# Altium PCB F407ZGT6.PcbDoc (part 4 of 7)
Units mil, origin at the board's own origin, x right, y up, seen from the top; angles counter-clockwise.
Board outline 4380 x 3940 mil, 2 copper layers (Top Layer, Bottom Layer); 88 components, 146 nets, 552 pads, 268 vias.
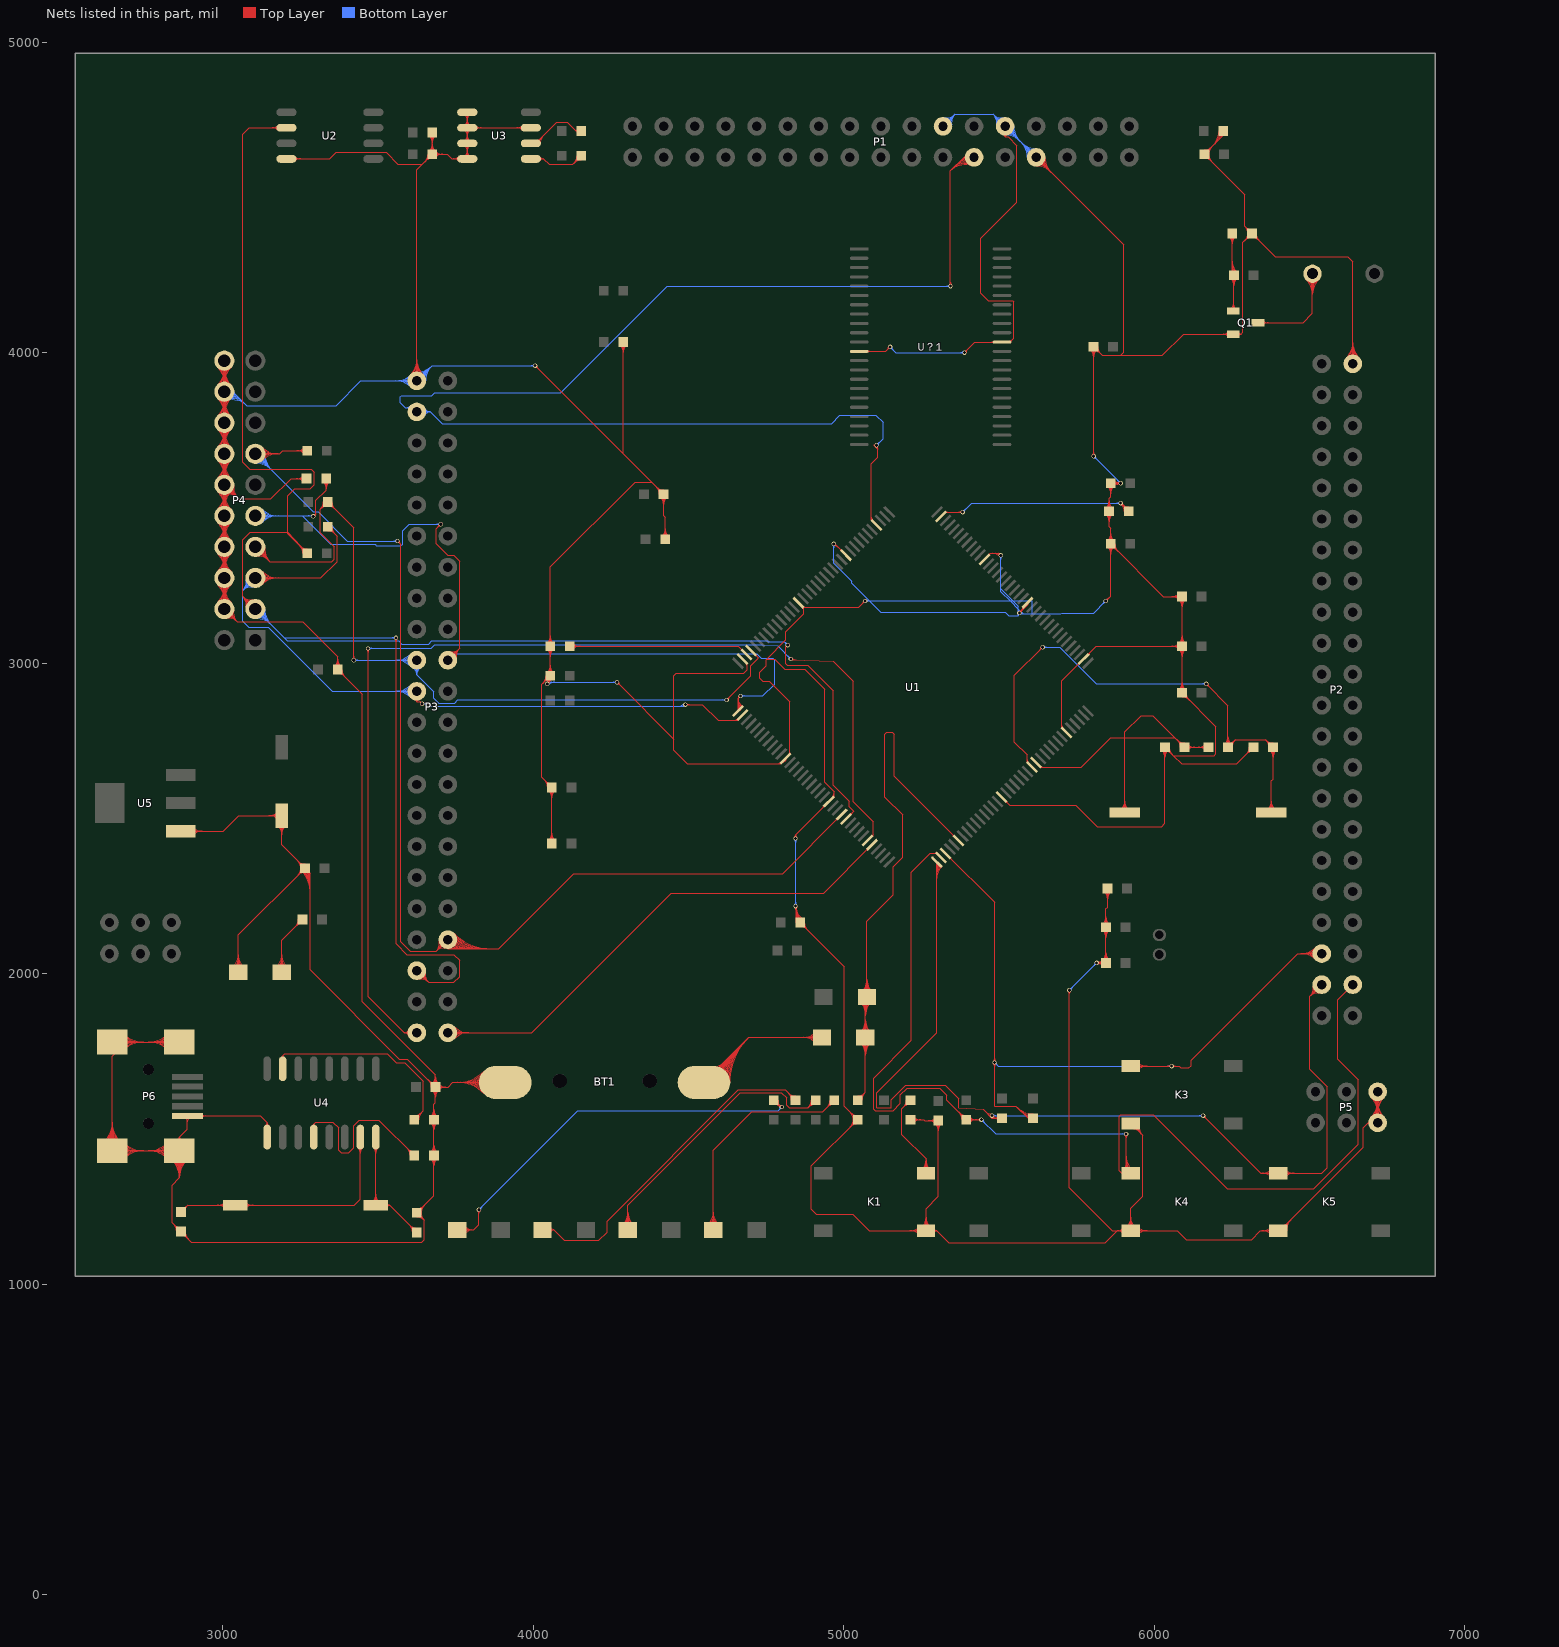
[diagram p4: the nets of this part, all layers, seen from the top]

## Via types
v1: diameter 14, hole 10, Top Layer to Bottom Layer, 265 vias
v2: diameter 150, hole 150, Top Layer to Bottom Layer, 3 vias

## Nets (pads, with @x,y where several pads share a name; then routed paths per layer and width w, separated by ;. In a path a pad name is that pad's centre, name@x,y a point inside that pad or via, vN(x,y) a via of type N, cw(c..) or ccw(c..) an arc to the next point about the centre after c; other vN are vias at no path point) (continued)
GND: (continued)
  Bottom Layer w4: P4.18@3004.56,3876.44 cw(c3014.66,3843.16) 3039.25,3867.75 ; P4.18@3005,3875 3032,3875 3077,3830 ; P4.18@3005.73,3872.61 cw(c3016.86,3835.92) 3043.97,3863.03 ; P4.18@3006.89,3868.78 cw(c3019.06,3828.68) 3048.69,3858.31 ; P4.18@3008.05,3864.95 cw(c3021.25,3821.44) 3053.41,3853.59 ; P4.18@3009.21,3861.12 cw(c3023.45,3814.2) 3058.12,3848.88 ; P4.18@3010.37,3857.3 cw(c3025.65,3806.96) 3062.84,3844.16 ; P4.18@3011.53,3853.47 cw(c3027.84,3799.72) 3067.56,3839.44 ; P4.18@3012.7,3849.64 cw(c3030.04,3792.48) 3072.28,3834.72 ; P4.18@3013.86,3845.81 cw(c3032.24,3785.24) 3077,3830 ; P4.18@3035.5,3875 ccw(c3043.95,3875) 3037.97,3869.03 ; P3.44@3605.2,3890.2 ccw(c3557.4,3842.4) 3557.4,3910 ccw(c3557.4,3977.6) P3.44@3605.2,3929.8 ; P3.44@3608.03,3893.03 ccw(c3567.06,3852.06) 3567.06,3910 ccw(c3567.06,3967.94) P3.44@3608.03,3926.97 ; P3.44@3610.86,3895.86 ccw(c3576.72,3861.72) 3576.72,3910 ccw(c3576.72,3958.28) P3.44@3610.86,3924.14 ; P3.44@3613.69,3898.69 ccw(c3586.37,3871.37) 3586.37,3910 ccw(c3586.37,3948.63) P3.44@3613.69,3921.31 ; P3.44@3625,3926 ccw(c3625,3964.63) 3652.31,3937.31 ccw(c3679.63,3910) P3.44@3641,3910 ; P3.44@3625,3930 ccw(c3625,3978.28) 3659.14,3944.14 ccw(c3693.28,3910) P3.44@3645,3910 ; P3.44@3625,3934 ccw(c3625,3991.94) 3665.97,3950.97 ccw(c3706.94,3910) P3.44@3649,3910 ; P3.44@3625,3938 ccw(c3625,4005.6) 3672.8,3957.8 ccw(c3720.6,3910) P3.44@3653,3910 ; v1@4002.46,3955.46 ccw(c3993.93,3946.93) 3993.93,3959 ccw(c3993.93,3971.07) v1@4002.46,3962.54 ; v1(4006,3959) 3674,3959 P3.44@3625,3910 3445,3910 3365,3830 3077,3830 ; v1(4045,2934) 4050,2939 v1(4270,2939) ; v1@4045.71,2933.29 cw(c4059.49,2919.51) 4059.49,2939 ; v1@4048.54,2930.46 cw(c4069.14,2909.86) 4069.14,2939 ; v1@4266.46,2935.46 ccw(c4257.93,2926.93) 4257.93,2939 ccw(c4257.93,2951.07) v1@4266.46,2942.54 ; v1@4841.46,2221.54 ccw(c4832.93,2230.07) 4845,2230.07 ccw(c4857.07,2230.07) v1@4848.54,2221.54 ; v1@4841.46,2432.46 cw(c4832.93,2423.93) 4845,2423.93 cw(c4857.07,2423.93) v1@4848.54,2432.46 ; v1(4845,2218) v1(4845,2436) ; v1@4964.46,3381.46 cw(c4955.93,3372.93) 4968,3372.93 cw(c4980.07,3372.93) v1@4971.54,3381.46 ; v1(4968,3385) 4968,3323.19 5026.19,3265 5026.19,3257.81 5083,3201 ; v1(5069,3201) 5083,3201 ; v1@5072.54,3197.46 cw(c5081.07,3188.93) 5081.07,3201 cw(c5081.07,3213.07) v1@5072.54,3204.54 ; v1@5149.5,4014.5 cw(c5149.5,4002.43) 5158.04,4010.96 cw(c5166.57,4019.5) v1@5154.5,4019.5 ; v1(5149.5,4019.5) 5168,4001 v1(5389,4001) ; P1.22@5320,4730 5358,4768 ; P1.22@5322.79,4745.75 ccw(c5326.53,4766.89) 5341.71,4751.71 ccw(c5356.89,4736.53) P1.22@5335.75,4732.79 ; P1.22@5323.49,4749.69 ccw(c5328.17,4776.12) 5347.14,4757.14 ccw(c5366.12,4738.17) P1.22@5339.69,4733.49 ; P1.22@5324.19,4753.63 ccw(c5329.8,4785.34) 5352.57,4762.57 ccw(c5375.34,4739.8) P1.22@5343.63,4734.19 ; P1.22@5324.88,4757.57 ccw(c5331.43,4794.56) 5358,4768 ; P1.22@5347.57,4734.88 cw(c5384.56,4741.43) 5358,4768 ; v1@5385.46,3997.46 ccw(c5376.93,3988.93) 5376.93,4001 ccw(c5376.93,4013.07) v1@5385.46,4004.54 ; P1.26@5492.43,4734.88 ccw(c5455.44,4741.43) 5482,4768 ; P1.26@5496.37,4734.19 ccw(c5464.66,4739.8) 5487.43,4762.57 ccw(c5510.2,4785.34) P1.26@5515.81,4753.63 ; P1.26@5500.31,4733.49 ccw(c5473.88,4738.17) 5492.86,4757.14 ccw(c5511.83,4776.12) P1.26@5516.51,4749.69 ; v1@5502.46,3344.46 cw(c5493.93,3335.93) 5506,3335.93 cw(c5518.07,3335.93) v1@5509.54,3344.46 ; P1.26@5504.25,4732.79 ccw(c5483.11,4736.53) 5498.29,4751.71 ccw(c5513.47,4766.89) P1.26@5517.21,4745.75 ; v1(5506,3348) 5506,3240 ; P1.26@5515.12,4757.57 cw(c5508.57,4794.56) 5482,4768 ; P1.26@5520,4702 cw(c5520,4634.4) 5567.8,4682.2 cw(c5615.6,4730) P1.26@5548,4730 ; P1.26@5520,4706 cw(c5520,4648.06) 5560.97,4689.03 cw(c5601.94,4730) P1.26@5544,4730 ; P1.26@5520,4710 cw(c5520,4661.72) 5554.14,4695.86 cw(c5588.28,4730) P1.26@5540,4730 ; P1.26@5520,4714 cw(c5520,4675.37) 5547.31,4702.69 cw(c5574.63,4730) P1.26@5536,4730 ; 5562,3169.22 ccw(c5568.72,3169.22) v1@5566.35,3162.94 ; v1@5562.14,3158.82 cw(c5558.78,3156.06) 5561.85,3152.98 ; v1@5562.27,3165.33 ccw(c5557.02,3170.02) 5562,3175 ; 5564.99,3172.01 cw(c5560.18,3167.2) v1@5565.25,3162.67 ; v1(5566,3162) 5562,3166 5562,3175 ; v1@5567.76,3166.68 cw(c5570.89,3175) 5562,3175 ; 5567.98,3169.02 cw(c5563.34,3164.37) v1@5568.24,3160 ; v1@5570.62,3163.92 ccw(c5578,3167) 5578,3159 ; P1.27@5592,4630 ccw(c5524.4,4630) 5572.2,4677.8 ccw(c5620,4725.6) P1.27@5620,4658 ; P1.27@5596,4630 ccw(c5538.06,4630) 5579.03,4670.97 ccw(c5620,4711.94) P1.27@5620,4654 ; P1.27@5600,4630 ccw(c5551.72,4630) 5585.86,4664.14 ccw(c5620,4698.28) P1.27@5620,4650 ; P1.27@5604,4630 ccw(c5565.37,4630) 5592.69,4657.31 ccw(c5620,4684.63) P1.27@5620,4646 ; P1.27@5620,4630 P1.26@5520,4730 5482,4768 ; v1(5727,1947) v1(5815,2035) ; v1@5727,1952 ccw(c5727,1964.07) 5735.54,1955.54 ccw(c5744.07,1947) v1@5732,1947 ; v1@5805,3662 cw(c5805,3649.93) 5813.54,3658.46 cw(c5822.07,3667) v1@5810,3667 ; v1(5805,3667) v1(5892,3580) ; v1@5810,2035 cw(c5797.93,2035) 5806.46,2026.46 cw(c5815,2017.93) v1@5815,2030 ; v1@5839.12,3201 cw(c5827.05,3201) 5835.59,3192.46 cw(c5844.12,3183.93) v1@5844.12,3196 ; v1(5844.12,3201) 5805.12,3162 5703,3162 5700,3159 5608,3159 ; v1@5887,3580 ccw(c5874.93,3580) 5883.46,3588.54 ccw(c5892,3597.07) v1@5892,3585 ; 5083,3201 5536,3201 ; 5083,3201 5119,3165 5519.84,3165 5531.85,3152.98 5561.85,3152.98 ; 5358,4768 5482,4768 ; 5506,3240 5506,3231 5536,3201 ; 5506,3240 5545,3201 ; 5536,3201 5562,3175 ; 5536,3201 5545,3201 ; 5545,3201 5608,3201 5608,3159 ; 5545,3201 5562,3184 5562,3175 ; 5561.85,3152.98 5567.87,3159 5578,3159 ; 5562,3175 5578,3159 ; 5578,3159 5608,3159
IIC-SCL: R14.1 U3.6 | length 288.6
  Top Layer w4: U3.6@3992.36,4675 4008,4675 4076,4743 4109,4743 4137,4715 ; U3.6@4012.36,4685.5 ccw(c4012.36,4700.32) 4022.84,4689.84 ; U3.6@4014.86,4675 cw(c4031.43,4675) 4019.71,4686.71 ; U3.6@4018.86,4675 cw(c4045.09,4675) 4026.54,4693.54 ; U3.6@4022.86,4675 cw(c4058.74,4675) 4033.37,4700.37 ; R14.1@4141.74,4711.38 ccw(c4137,4710.09) 4137,4715 ; R14.1@4141.74,4718.62 cw(c4137,4719.91) 4137,4715 ; R14.1@4155,4715 4137,4715
IIC-SDA: R15.1 U3.5 | length 316.6
  Top Layer w4: U3.5@3992.36,4625 4033,4625 ; U3.5@4017.62,4621.17 cw(c4025.14,4615.7) 4025.14,4625 cw(c4025.14,4634.3) U3.5@4017.62,4628.83 ; U3.5@4020.85,4618.82 cw(c4033,4609.97) 4033,4625 ; U3.5@4020.85,4631.18 ccw(c4033,4640.03) 4033,4625 ; R15.1@4141.25,4635 cw(c4108.06,4635) 4131.53,4611.53 cw(c4155,4588.06) R15.1@4155,4621.25 ; R15.1@4145.25,4635 cw(c4121.72,4635) 4138.36,4618.36 cw(c4155,4601.72) R15.1@4155,4625.25 ; R15.1@4155,4635 4127,4607 4051,4607 4033,4625
IIC_SCL: P3.2 U1.139 | length 3651.9
  Top Layer w4: v1@3464.46,3044.46 cw(c3455.93,3035.93) 3468,3035.93 cw(c3480.07,3035.93) v1@3471.54,3044.46 ; v1(3468,3048) 3468,1926 3584,1810 ; P3.2@3598.92,1799.81 ccw(c3584,1793.98) 3584,1810 ; P3.2@3598.92,1820.19 cw(c3584,1826.02) 3584,1810 ; P3.2@3602.65,1801.27 ccw(c3589.86,1796.27) 3589.86,1810 ccw(c3589.86,1823.73) P3.2@3602.65,1818.73 ; P3.2@3625,1810 3584,1810 ; v1(4829.77,3014) 4829.77,3012 4966.77,3006.23 5031,2942 5031,2554 5096,2489 5096,2448.31 U1.139@5077.29,2429.6 ; v1@4830.51,3014.68 ccw(c4837.31,3020.93) 4836.92,3011.7 ; v1@4833.15,3010.32 cw(c4836.71,3006.45) 4836.93,3011.7 ; v1@4833.45,3017.38 ccw(c4847.36,3030.17) 4846.57,3011.29 ; U1.139@5090.93,2445.57 ccw(c5090.93,2451.2) 5094.91,2447.22 ccw(c5098.89,2443.24) U1.139@5093.26,2443.24
  Bottom Layer w4: v1(3468,3048) 3671,3048 3683,3060 4738.15,3060 4786.86,3056.91 v1(4829.77,3014) ; v1@3471.54,3044.46 cw(c3480.07,3035.93) 3480.07,3048 cw(c3480.07,3060.07) v1@3471.54,3051.54 ; v1@4824.77,3014 ccw(c4812.7,3014) 4821.23,3022.54 ccw(c4829.77,3031.07) v1@4829.77,3019
IIC_SDA: P3.1 U1.140 | length 1959.6
  Top Layer w4: P3.1@3725,1810 3995,1810 4445,2260 4935.53,2260 U1.140@5091.21,2415.68 ; P3.1@3736.31,1798.69 cw(c3763.63,1771.37) 3763.63,1810 cw(c3763.63,1848.63) P3.1@3736.31,1821.31 ; P3.1@3739.14,1795.86 cw(c3773.28,1761.72) 3773.28,1810 cw(c3773.28,1858.28) P3.1@3739.14,1824.14 ; P3.1@3741.97,1793.03 cw(c3782.94,1752.06) 3782.94,1810 cw(c3782.94,1867.94) P3.1@3741.97,1826.97 ; P3.1@3744.8,1790.2 cw(c3792.6,1742.4) 3792.6,1810 cw(c3792.6,1877.6) P3.1@3744.8,1829.8 ; U1.140@5075.24,2402.04 cw(c5069.61,2402.04) 5073.59,2398.06 cw(c5077.57,2394.08) U1.140@5077.57,2399.71
JTCK: P3.25 P4.9 R7.2 U1.109 | length 3657.9
  Top Layer w4: v1(3291.5,3473.5) 3300,3482 ; v1@3291.52,3478.5 ccw(c3291.55,3490.45) 3300,3482 ; v1@3296.5,3473.52 cw(c3308.45,3473.55) 3300,3482 ; R7.2@3323.27,3585.28 cw(c3299.8,3561.81) 3332.99,3561.81 cw(c3366.18,3561.81) R7.2@3342.71,3585.28 ; R7.2@3326.1,3588.11 cw(c3309.46,3571.47) 3332.99,3571.47 cw(c3356.53,3571.47) R7.2@3339.88,3588.11 ; R7.2@3332.99,3595 3332.99,3557.99 3300,3525 3300,3482 ; v1@3697,3448 cw(c3684.93,3448) 3693.46,3439.46 cw(c3702,3430.93) v1@3702,3443 ; v1(3702,3448) 3687,3433 3687,3386 3725,3348 3744,3348 3763,3329 3763,3048 ; P3.25@3725,3010 3763,3048 ; P3.25@3727.79,3025.75 ccw(c3731.53,3046.89) 3746.71,3031.71 ccw(c3761.89,3016.53) P3.25@3740.75,3012.79 ; P3.25@3728.49,3029.69 ccw(c3733.17,3056.12) 3752.14,3037.14 ccw(c3771.12,3018.17) P3.25@3744.69,3013.49 ; P3.25@3729.19,3033.63 ccw(c3734.8,3065.34) 3757.57,3042.57 ccw(c3780.34,3019.8) P3.25@3748.63,3014.19 ; P3.25@3729.88,3037.57 ccw(c3736.43,3074.56) 3763,3048 ; P3.25@3752.57,3014.88 cw(c3789.56,3021.43) 3763,3048 ; U1.109@4659.71,2847.18 4659.71,2887 ; 4659.71,2860.77 ccw(c4673.33,2860.77) U1.109@4667.09,2848.66 ; 4659.71,2867.33 ccw(c4676.7,2867.33) U1.109@4668.92,2852.22 ; 4659.71,2873.89 ccw(c4680.07,2873.89) U1.109@4670.76,2855.78 ; 4659.71,2880.44 ccw(c4683.45,2880.44) U1.109@4672.59,2859.33 ; v1@4662.71,2894.77 cw(c4652.43,2894.28) 4659.71,2887 ; v1@4667.47,2890.01 ccw(c4666.99,2879.72) 4659.71,2887 ; v1(4667.71,2895) 4659.71,2887 ; U1.109@4674.42,2862.89 cw(c4686.82,2887) 4659.71,2887
  Bottom Layer w4: P4.9@3105,3475 3256,3475 ; P4.9@3115.25,3464.75 cw(c3140.01,3439.99) 3140.01,3475 cw(c3140.01,3510.01) P4.9@3115.25,3485.25 ; P4.9@3118.08,3461.92 cw(c3149.66,3430.34) 3149.66,3475 cw(c3149.66,3519.66) P4.9@3118.08,3488.08 ; P4.9@3120.91,3459.09 cw(c3159.32,3420.68) 3159.32,3475 cw(c3159.32,3529.32) P4.9@3120.91,3490.91 ; P4.9@3123.74,3456.26 cw(c3168.98,3411.02) 3168.98,3475 cw(c3168.98,3538.98) P4.9@3123.74,3493.74 ; P4.9@3126.57,3453.43 cw(c3178.63,3401.37) 3178.63,3475 cw(c3178.63,3548.63) P4.9@3126.57,3496.57 ; 3275.81,3475 cw(c3275.81,3457.81) v1@3287.96,3469.96 ; 3283.05,3475 ccw(c3283.05,3481.95) v1@3287.96,3477.04 ; v1(3291.5,3473.5) 3290,3475 3256,3475 ; v1@3698.46,3444.46 ccw(c3689.93,3435.93) 3689.93,3448 ccw(c3689.93,3460.07) v1@3698.46,3451.54 ; v1(3702,3448) 3600,3448 3579,3427 3579,3384 3573.86,3378.86 3495,3378.86 3490.86,3383 3348,3383 3256,3475 ; P3.25@3725,3010 3746,3031 4720,3031 4734.09,3016.91 4772,3016.91 4777.23,3011.68 4777.23,2933.23 4739,2895 v1(4667.71,2895) ; v1@4671.24,2891.46 cw(c4679.78,2882.93) 4679.78,2895 cw(c4679.78,2907.07) v1@4671.24,2898.54
JTDI: P3.24 P4.5 R4.2 U1.110 | length 3570.5
  Top Layer w4: P4.5@3105,3275 3316,3275 3369,3328 3369,3408.99 R4.2@3337.99,3440 ; P4.5@3115.25,3264.75 cw(c3140.01,3239.99) 3140.01,3275 cw(c3140.01,3310.01) P4.5@3115.25,3285.25 ; P4.5@3118.08,3261.92 cw(c3149.66,3230.34) 3149.66,3275 cw(c3149.66,3319.66) P4.5@3118.08,3288.08 ; P4.5@3120.91,3259.09 cw(c3159.32,3220.68) 3159.32,3275 cw(c3159.32,3329.32) P4.5@3120.91,3290.91 ; P4.5@3123.74,3256.26 cw(c3168.98,3211.02) 3168.98,3275 cw(c3168.98,3338.98) P4.5@3123.74,3293.74 ; P4.5@3126.57,3253.43 cw(c3178.63,3201.37) 3178.63,3275 cw(c3178.63,3348.63) P4.5@3126.57,3296.57 ; R4.2@3337.99,3426.25 cw(c3337.99,3393.06) 3361.46,3416.53 cw(c3384.93,3440) R4.2@3351.74,3440 ; R4.2@3337.99,3430.25 cw(c3337.99,3406.72) 3354.63,3423.36 cw(c3371.27,3440) R4.2@3347.74,3440 ; P3.24@3620.44,2882.37 cw(c3619.55,2877) 3625,2877 ; P3.24@3625,2910 3625,2877 ; P3.24@3629.56,2882.37 ccw(c3630.45,2877) 3625,2877 ; v1@3637.06,2870.75 ccw(c3629.84,2871.84) 3635,2877 ; v1@3641.25,2874.94 cw(c3640.16,2882.16) 3635,2877 ; v1(3642,2870) 3635,2877 ; v1(4490,2867) 4545,2867 4596,2816 4656.37,2816 ; v1@4493.54,2863.46 cw(c4502.07,2854.93) 4502.07,2867 cw(c4502.07,2879.07) v1@4493.54,2870.54 ; 4645.62,2816 ccw(c4645.62,2833.98) U1.110@4658.34,2821.27 ; 4655.28,2816 ccw(c4655.28,2824.33) U1.110@4661.17,2818.44 ; U1.110@4657.66,2819.46 cw(c4653.22,2819.15) 4656.37,2816 ; U1.110@4659.82,2817.29 ccw(c4659.52,2812.85) 4656.37,2816 ; U1.110@4673.63,2833.26 4656.37,2816 ; 3625,2877 3635,2877
  Bottom Layer w4: P4.5@3075.01,3269.45 cw(c3035.82,3262.19) 3064,3234 ; P4.5@3078.94,3270.17 cw(c3044.89,3263.87) 3069.38,3239.38 cw(c3093.87,3214.89) P4.5@3100.17,3248.94 ; P4.5@3082.88,3270.9 cw(c3053.96,3265.55) 3074.76,3244.76 cw(c3095.55,3223.96) P4.5@3100.9,3252.88 ; P4.5@3086.81,3271.63 cw(c3063.04,3267.23) 3080.13,3250.13 cw(c3097.23,3233.04) P4.5@3101.63,3256.81 ; P4.5@3099.45,3245.01 ccw(c3092.19,3205.82) 3064,3234 ; P4.5@3105,3275 3064,3234 ; P3.24@3605.2,2890.2 ccw(c3557.4,2842.4) 3557.4,2910 ccw(c3557.4,2977.6) P3.24@3605.2,2929.8 ; P3.24@3608.03,2893.03 ccw(c3567.06,2852.06) 3567.06,2910 ccw(c3567.06,2967.94) P3.24@3608.03,2926.97 ; P3.24@3610.86,2895.86 ccw(c3576.72,2861.72) 3576.72,2910 ccw(c3576.72,2958.28) P3.24@3610.86,2924.14 ; P3.24@3613.69,2898.69 ccw(c3586.37,2871.37) 3586.37,2910 ccw(c3586.37,2948.63) P3.24@3613.69,2921.31 ; P3.24@3625,2910 3352,2910 3146,3116 3084,3116 3064,3136 3064,3234 ; v1(3642,2870) 3664,2870 3672,2862 4485,2862 v1(4490,2867) ; v1@3645.54,2866.46 cw(c3654.07,2857.93) 3654.07,2870 cw(c3654.07,2882.07) v1@3645.54,2873.54 ; 4465.86,2862 ccw(c4465.86,2891.14) v1@4486.46,2870.54 ; 4475.51,2862 ccw(c4475.51,2881.49) v1@4489.29,2867.71
JTDO: P3.7 P4.13 R6.2 U1.133 | length 6055.8
  Top Layer w4: P4.13@3105,3675 3183,3675 3193,3685 R6.2@3272.01,3685 ; P4.13@3115.25,3664.75 cw(c3140.01,3639.99) 3140.01,3675 cw(c3140.01,3710.01) P4.13@3115.25,3685.25 ; P4.13@3118.08,3661.92 cw(c3149.66,3630.34) 3149.66,3675 cw(c3149.66,3719.66) P4.13@3118.08,3688.08 ; P4.13@3120.91,3659.09 cw(c3159.32,3620.68) 3159.32,3675 cw(c3159.32,3729.32) P4.13@3120.91,3690.91 ; P4.13@3123.74,3656.26 cw(c3168.98,3611.02) 3168.98,3675 cw(c3168.98,3738.98) P4.13@3123.74,3693.74 ; P4.13@3126.57,3653.43 cw(c3178.63,3601.37) 3178.63,3675 cw(c3178.63,3748.63) P4.13@3126.57,3696.57 ; R6.2@3262.29,3675.28 ccw(c3238.82,3651.81) 3238.82,3685 ccw(c3238.82,3718.19) R6.2@3262.29,3694.72 ; R6.2@3265.12,3678.11 ccw(c3248.47,3661.47) 3248.47,3685 ccw(c3248.47,3708.53) R6.2@3265.12,3691.89 ; v1@3563,3389 cw(c3563,3376.93) 3571.54,3385.46 cw(c3580.07,3394) v1@3568,3394 ; v1(3563,3394) 3573,3384 3573,2103 3604,2072 3687,2072 ; P3.7@3697.43,2105.12 cw(c3660.44,2098.57) 3687,2072 ; P3.7@3701.37,2105.81 cw(c3669.66,2100.2) 3692.43,2077.43 cw(c3715.2,2054.66) P3.7@3720.81,2086.37 ; P3.7@3705.31,2106.51 cw(c3678.88,2101.83) 3697.86,2082.86 cw(c3716.83,2063.88) P3.7@3721.51,2090.31 ; P3.7@3708.03,2093.03 ccw(c3737.07,2122.07) 3737.07,2081 ; P3.7@3709.25,2107.21 cw(c3688.11,2103.47) 3703.29,2088.29 cw(c3718.47,2073.11) P3.7@3722.21,2094.25 ; P3.7@3710.86,2095.86 ccw(c3746.73,2131.73) 3746.73,2081 ; P3.7@3713.69,2098.69 ccw(c3756.38,2141.38) 3756.38,2081 ; P3.7@3716.51,2101.51 ccw(c3766.04,2151.04) 3766.04,2081 ; P3.7@3719.34,2104.34 ccw(c3775.7,2160.7) 3775.7,2081 ; P3.7@3720.12,2082.43 ccw(c3713.57,2045.44) 3687,2072 ; P3.7@3722.17,2107.17 ccw(c3785.36,2170.36) 3785.36,2081 ; P3.7@3727.83,2112.83 ccw(c3804.67,2189.67) 3804.67,2081 ; P3.7@3730.66,2115.66 ccw(c3814.33,2199.33) 3814.33,2081 ; P3.7@3733.49,2118.49 ccw(c3823.98,2208.98) 3823.98,2081 ; P3.7@3736.31,2121.31 ccw(c3833.64,2218.64) 3833.64,2081 ; P3.7@3739.14,2124.14 ccw(c3843.3,2228.3) 3843.3,2081 ; P3.7@3741.97,2126.97 ccw(c3852.95,2237.95) 3852.95,2081 ; P3.7@3744.8,2129.8 ccw(c3862.61,2247.61) 3862.61,2081 ; 3795.01,2081 cw(c3795.01,2180.01) P3.7@3725,2110 ; U1.133@4977.8,2499.47 cw(c4972.18,2499.47) 4976.15,2495.49 cw(c4980.13,2491.52) U1.133@4980.13,2497.14 ; U1.133@4993.77,2513.11 4803.66,2323 4131,2323 3889,2081 3725,2081 P3.7@3725,2110 ; 3687,2072 P3.7@3725,2110
  Bottom Layer w4: P4.13@3105,3644.5 cw(c3105,3570.87) 3157.07,3622.93 cw(c3209.13,3675) P4.13@3135.5,3675 ; P4.13@3105,3648.5 cw(c3105,3584.52) 3150.24,3629.76 cw(c3195.48,3675) P4.13@3131.5,3675 ; P4.13@3105,3652.5 cw(c3105,3598.18) 3143.41,3636.59 cw(c3181.82,3675) P4.13@3127.5,3675 ; P4.13@3105,3656.5 cw(c3105,3611.84) 3136.58,3643.42 cw(c3168.16,3675) P4.13@3123.5,3675 ; P4.13@3105,3660.5 cw(c3105,3625.49) 3129.75,3650.25 cw(c3154.51,3675) P4.13@3119.5,3675 ; P4.13@3105,3675 3291.27,3488.73 3306.86,3488.73 3401.59,3394 v1(3563,3394) ; v1@3559.46,3390.46 ccw(c3550.93,3381.93) 3550.93,3394 ccw(c3550.93,3406.07) v1@3559.46,3397.54
JTMS: P3.26 P4.7 R5.2 U1.105 | length 3596
  Top Layer w4: P4.7@3105,3375 3152,3328 ; P4.7@3106.39,3356.55 cw(c3108.99,3321.97) 3133.51,3346.49 cw(c3158.03,3371.01) P4.7@3123.45,3373.61 ; P4.7@3106.69,3352.56 cw(c3109.85,3310.51) 3139.67,3340.33 cw(c3169.49,3370.15) P4.7@3127.44,3373.31 ; P4.7@3106.99,3348.57 cw(c3110.71,3299.04) 3145.83,3334.17 cw(c3180.96,3369.29) P4.7@3131.43,3373.01 ; P4.7@3107.29,3344.59 cw(c3111.57,3287.58) 3152,3328 ; P4.7@3135.41,3372.71 ccw(c3192.42,3368.43) 3152,3328 ; R5.2@3324.24,3520 cw(c3291.05,3520) 3314.52,3496.53 cw(c3337.99,3473.06) 3337.99,3506.25 cw(c3337.99,3473.06) 3361.46,3496.53 cw(c3384.93,3520) R5.2@3351.74,3520 ; R5.2@3328.24,3520 cw(c3304.71,3520) 3321.35,3503.36 cw(c3337.99,3486.72) 3337.99,3510.25 cw(c3337.99,3486.72) 3354.63,3503.36 cw(c3371.27,3520) R5.2@3347.74,3520 ; v1@3418.46,3013.54 ccw(c3409.93,3022.07) 3422,3022.07 ccw(c3434.07,3022.07) v1@3425.54,3013.54 ; v1(3422,3010) 3422,3435.99 R5.2@3337.99,3520 3314,3496.01 3314,3420 3359,3375 3359,3336 3351,3328 3152,3328 ; v1(4623,2882) 4701,2960 4701,2993 4725,3017 4725,3018.52 U1.105@4701.47,3042.05 ; v1@4623,2887 ccw(c4623,2899.07) 4631.54,2890.54 ccw(c4640.07,2882) v1@4628,2882 ; U1.105@4715.11,3026.08 cw(c4715.11,3020.45) 4719.09,3024.43 cw(c4723.06,3028.41) U1.105@4717.44,3028.41
  Bottom Layer w4: v1(3422,3010) P3.26@3625,3010 3625,2963.74 ; v1@3425.54,3006.46 cw(c3434.07,2997.93) 3434.07,3010 cw(c3434.07,3022.07) v1@3425.54,3013.54 ; P3.26@3605.2,2990.2 ccw(c3557.4,2942.4) 3557.4,3010 ccw(c3557.4,3077.6) P3.26@3605.2,3029.8 ; P3.26@3608.03,2993.03 ccw(c3567.06,2952.06) 3567.06,3010 ccw(c3567.06,3067.94) P3.26@3608.03,3026.97 ; P3.26@3610.86,2995.86 ccw(c3576.72,2961.72) 3576.72,3010 ccw(c3576.72,3058.28) P3.26@3610.86,3024.14 ; P3.26@3612.02,2985.19 cw(c3600.79,2963.74) 3625,2963.74 ; P3.26@3613.69,2998.69 ccw(c3586.37,2971.37) 3586.37,3010 ccw(c3586.37,3048.63) P3.26@3613.69,3021.31 ; P3.26@3613.87,2988.74 cw(c3604.25,2970.35) 3625,2970.35 cw(c3645.75,2970.35) P3.26@3636.13,2988.74 ; P3.26@3615.73,2992.28 cw(c3607.71,2976.96) 3625,2976.96 cw(c3642.29,2976.96) P3.26@3634.27,2992.28 ; P3.26@3637.98,2985.19 ccw(c3649.21,2963.74) 3625,2963.74 ; v1@4619.46,2878.46 ccw(c4610.93,2869.93) 4610.93,2882 ccw(c4610.93,2894.07) v1@4619.46,2885.54 ; v1(4623,2882) 3757,2882 3747,2872 3696,2872 3680,2888 3680,2908.74 3625,2963.74
JTRST: P3.6 P4.3 R2.2 U1.134 U2.2 | length 7768.6
  Top Layer w4: P4.3@3075.01,3180.55 ccw(c3035.82,3187.81) 3064,3216 ; P4.3@3078.94,3179.83 ccw(c3044.89,3186.13) 3069.38,3210.62 ccw(c3093.87,3235.11) P4.3@3100.17,3201.06 ; P4.3@3082.88,3179.1 ccw(c3053.96,3184.45) 3074.76,3205.24 ccw(c3095.55,3226.04) P4.3@3100.9,3197.12 ; P4.3@3086.81,3178.37 ccw(c3063.04,3182.77) 3080.13,3199.87 ccw(c3097.23,3216.96) P4.3@3101.63,3193.19 ; P4.3@3099.45,3204.99 cw(c3092.19,3244.18) 3064,3216 ; P4.3@3105,3175 3064,3216 ; U2.2@3177.58,4717.58 ccw(c3159.65,4699.65) 3159.65,4725 ccw(c3159.65,4750.35) U2.2@3177.58,4732.42 ; U2.2@3180.4,4720.4 ccw(c3169.31,4709.31) 3169.31,4725 ccw(c3169.31,4740.69) U2.2@3180.4,4729.6 ; U2.2@3205,4725 3085,4725 3064,4704 3064,3648 3087,3625 3285,3625 3294,3616 3294,3576 3281,3563 3232,3563 3209,3540 3209,3422 ; R2.2@3258.26,3355 ccw(c3225.07,3355) 3248.54,3378.47 ccw(c3272.01,3401.94) R2.2@3272.01,3368.75 ; R2.2@3258.27,3355.42 ccw(c3225.09,3356.44) 3249.27,3379.18 ccw(c3273.45,3401.92) R2.2@3272.43,3368.74 ; R2.2@3262.26,3355 ccw(c3238.73,3355) 3255.37,3371.64 ccw(c3272.01,3388.28) R2.2@3272.01,3364.75 ; R2.2@3262.26,3355.3 ccw(c3238.74,3356.02) 3255.89,3372.14 ccw(c3273.03,3388.27) R2.2@3272.31,3364.74 ; v1@3554.46,3078.46 cw(c3545.93,3069.93) 3558,3069.93 cw(c3570.07,3069.93) v1@3561.54,3078.46 ; v1(3558,3082) 3558,2097 3593,2062 3744,2062 3763,2043 3763,1991 3744,1972 3663,1972 ; P3.6@3625,2010 3663,1972 ; P3.6@3627.79,1994.25 cw(c3631.53,1973.11) 3646.71,1988.29 cw(c3661.89,2003.47) P3.6@3640.75,2007.21 ; P3.6@3628.49,1990.31 cw(c3633.17,1963.88) 3652.14,1982.86 cw(c3671.12,2001.83) P3.6@3644.69,2006.51 ; P3.6@3629.19,1986.37 cw(c3634.8,1954.66) 3657.57,1977.43 cw(c3680.34,2000.2) P3.6@3648.63,2005.81 ; P3.6@3629.88,1982.43 cw(c3636.43,1945.44) 3663,1972 ; P3.6@3652.57,2005.12 ccw(c3689.56,1998.57) 3663,1972 ; v1@4814.81,3057.83 cw(c4808.36,3056.64) 4813,3052 ; v1@4818.83,3053.81 ccw(c4817.64,3047.36) 4813,3052 ; v1(4819.73,3058.73) 4813,3052 ; U1.134@5007.69,2499.19 5018,2509.5 5019.5,2509.5 5033,2523 5018,2538 5018,2555 4966,2607 4966,2912 4883.84,2994.16 4817.84,2994.16 4813,2999 4813,3052 ; U1.134@5021.33,2515.17 ccw(c5021.33,2524.42) 5027.88,2517.88 ; 3064,3216 3064,3398 3088,3422 3209,3422 ; 3209,3422 R2.2@3272.01,3355 3209,3418.01 3209,3422
  Bottom Layer w4: P4.3@3105,3144.5 cw(c3105,3070.87) 3157.07,3122.93 cw(c3209.13,3175) P4.3@3135.5,3175 ; P4.3@3105,3148.5 cw(c3105,3084.52) 3150.24,3129.76 cw(c3195.48,3175) P4.3@3131.5,3175 ; P4.3@3105,3152.5 cw(c3105,3098.18) 3143.41,3136.59 cw(c3181.82,3175) P4.3@3127.5,3175 ; P4.3@3105,3156.5 cw(c3105,3111.84) 3136.58,3143.42 cw(c3168.16,3175) P4.3@3123.5,3175 ; P4.3@3105,3160.5 cw(c3105,3125.49) 3129.75,3150.25 cw(c3154.51,3175) P4.3@3119.5,3175 ; P4.3@3105,3175 3198,3082 ; v1@3554.46,3078.46 ccw(c3545.93,3069.93) 3545.93,3082 ccw(c3545.93,3094.07) v1@3554.46,3085.54 ; v1(3558,3082) 3198,3082 ; v1@4814.73,3058.73 ccw(c4802.66,3058.73) 4811.2,3067.27 ccw(c4819.73,3075.8) v1@4819.73,3063.73 ; v1(4819.73,3058.73) 4808.71,3069.75 4756.45,3069.75 4754.2,3072 3673,3072 3663,3062 3577,3062 3567,3072 3208,3072 3198,3082
KEY_0: K3.4 P2.6 R20.1 U1.3 | length 3219
  Top Layer w4: U1.3@5327.84,2387.84 5486,2229.68 v1(5486,1714) 5486,1574 5555,1574 5594,1535 ; U1.3@5341.48,2371.87 cw(c5341.48,2366.24) 5345.46,2370.22 cw(c5349.44,2374.2) U1.3@5343.81,2374.2 ; v1@5482.46,1710.46 cw(c5473.93,1701.93) 5486,1701.93 cw(c5498.07,1701.93) v1@5489.54,1710.46 ; v1@5482.46,1717.54 ccw(c5473.93,1726.07) 5486,1726.07 ccw(c5498.07,1726.07) v1@5489.54,1717.54 ; 5559.22,1569.78 ccw(c5610,1620.57) R20.1@5610,1548.75 ; 5566.05,1562.95 ccw(c5610,1606.91) R20.1@5610,1544.75 ; 5572.87,1556.13 ccw(c5610,1593.25) R20.1@5610,1540.75 ; 5579.7,1549.3 ccw(c5610,1579.6) R20.1@5610,1536.75 ; 5586.53,1542.47 ccw(c5610,1565.94) R20.1@5610,1532.75 ; 5593.36,1535.64 ccw(c5610,1552.28) R20.1@5610,1528.75 ; R20.1@5596.41,1532.93 ccw(c5594,1532.56) 5594,1535 ; R20.1@5596.41,1537.07 cw(c5594,1537.44) 5594,1535 ; R20.1@5610,1535 5594,1535 ; K3.4@5924.65,1702.52 v1(6056.56,1702.52) 6080.63,1702.52 6086.53,1696.62 6112.06,1696.62 6119.44,1704 6119.44,1721.44 6463,2065 P2.6@6540,2065 ; K3.4@5941.34,1695.67 cw(c5957.87,1679.14) 5957.87,1702.52 cw(c5957.87,1725.9) K3.4@5941.34,1709.37 ; K3.4@5944.17,1692.84 cw(c5967.53,1669.48) 5967.53,1702.52 cw(c5967.53,1735.56) K3.4@5944.17,1712.2 ; K3.4@5946.99,1690.01 cw(c5977.18,1659.82) 5977.18,1702.52 cw(c5977.18,1745.22) K3.4@5946.99,1715.03 ; v1@6053.02,1698.98 ccw(c6044.49,1690.45) 6044.49,1702.52 ccw(c6044.49,1714.59) v1@6053.02,1706.06 ; v1@6060.1,1698.98 cw(c6068.63,1690.45) 6068.63,1702.52 cw(c6068.63,1714.59) v1@6060.1,1706.06 ; P2.6@6520.2,2045.2 ccw(c6472.4,1997.4) 6472.4,2065 ccw(c6472.4,2132.6) P2.6@6520.2,2084.8 ; P2.6@6523.03,2048.03 ccw(c6482.06,2007.06) 6482.06,2065 ccw(c6482.06,2122.94) P2.6@6523.03,2081.97 ; P2.6@6525.86,2050.86 ccw(c6491.72,2016.72) 6491.72,2065 ccw(c6491.72,2113.28) P2.6@6525.86,2079.14 ; P2.6@6528.69,2053.69 ccw(c6501.37,2026.37) 6501.37,2065 ccw(c6501.37,2103.63) P2.6@6528.69,2076.31
  Bottom Layer w4: v1@5486,1709 cw(c5486,1696.93) 5494.54,1705.46 cw(c5503.07,1714) v1@5491,1714 ; v1(5486,1714) 5497.48,1702.52 v1(6056.56,1702.52) ; v1@6053.02,1698.98 ccw(c6044.49,1690.45) 6044.49,1702.52 ccw(c6044.49,1714.59) v1@6053.02,1706.06
KEY_1: K4.4 P2.3 R21.1 U1.2 | length 4149.1
  Top Layer w4: U1.2@5298.63,2385.91 ccw(c5294.65,2381.93) 5294.65,2387.56 ccw(c5294.65,2393.19) U1.2@5298.63,2389.21 ; U1.2@5313.92,2373.92 5300.28,2387.56 5278.56,2387.56 5218,2327 5218,1786 5096.25,1664.25 5096.25,1564 5101.01,1559.24 5158.99,1559.24 5182.99,1583.24 5182.99,1609.99 5204,1631 5309,1631 5332,1608 5332,1593 R21.1@5395,1530 v1(5443.72,1530) ; R21.1@5381.25,1530 ccw(c5348.06,1530) 5371.53,1553.47 ccw(c5395,1576.94) R21.1@5395,1543.75 ; R21.1@5385.25,1530 ccw(c5361.72,1530) 5378.36,1546.64 ccw(c5395,1563.28) R21.1@5395,1539.75 ; R21.1@5401.89,1523.11 cw(c5418.53,1506.47) 5418.53,1530 cw(c5418.53,1553.53) R21.1@5401.89,1536.89 ; R21.1@5404.72,1520.28 cw(c5428.19,1496.81) 5428.19,1530 cw(c5428.19,1563.19) R21.1@5404.72,1539.72 ; v1@5440.18,1526.46 ccw(c5431.65,1517.93) 5431.65,1530 ccw(c5431.65,1542.07) v1@5440.18,1533.54 ; K4.4@5897.23,1355.53 ccw(c5895,1355.28) 5895,1357.52 ; K4.4@5897.23,1359.51 cw(c5895,1359.76) 5895,1357.52 ; K4.4@5902.3,1370.03 ccw(c5883.7,1388.62) 5910,1388.62 ; K4.4@5905.13,1367.2 ccw(c5893.36,1378.96) 5910,1378.96 ; v1@5906.46,1480.46 cw(c5897.93,1471.93) 5910,1471.93 cw(c5922.07,1471.93) v1@5913.54,1480.46 ; 5910,1382.84 ccw(c5940.12,1382.84) K4.4@5918.82,1361.54 ; 5910,1392.5 ccw(c5949.78,1392.5) K4.4@5921.65,1364.37 ; 5910,1402.16 ccw(c5959.44,1402.16) K4.4@5924.48,1367.2 ; 5910,1411.81 ccw(c5969.1,1411.81) K4.4@5927.31,1370.03 ; v1(5910,1484) K4.4@5910,1357.52 ; K4.4@5924.65,1357.52 K4.4@5910,1357.52 ; P2.3@6640,1965 6592,1917 6592,1724 6658,1658 6658,1451 6515,1308 6235,1308 5997,1546 5892,1546 5887.12,1541.12 5887.12,1365.4 5895,1357.52 ; 5895,1357.52 K4.4@5910,1357.52
  Bottom Layer w4: v1@5443.72,1525 cw(c5443.72,1512.93) 5452.25,1521.46 cw(c5460.79,1530) v1@5448.72,1530 ; v1(5443.72,1530) 5489.72,1484 v1(5910,1484) ; v1@5906.46,1480.46 ccw(c5897.93,1471.93) 5897.93,1484 ccw(c5897.93,1496.07) v1@5906.46,1487.54
KEY_2: K5.4 P2.4 R22.1 U1.1 | length 4029.2
  Top Layer w4: 5300,2307.8 cw(c5352.2,2307.8) U1.1@5315.29,2344.71 ; 5300,2317.46 cw(c5342.54,2317.46) U1.1@5312.46,2347.54 ; 5300,2327.11 cw(c5332.89,2327.11) U1.1@5309.63,2350.37 ; 5300,2336.77 cw(c5323.23,2336.77) U1.1@5306.8,2353.2 ; 5300,2346.43 cw(c5313.57,2346.43) U1.1@5303.98,2356.02 ; U1.1@5300,2356.08 cw(c5303.92,2356.08) U1.1@5301.15,2358.85 ; U1.1@5300,2360 5300,1810.49 5106.25,1616.74 5106.25,1569.24 5153.75,1569.24 5153.75,1594.89 5199.86,1641 5328,1641 5371,1598 5371,1569 5449.72,1563 5477.72,1535 5486,1535 ; 5455.33,1557.39 ccw(c5478,1580.07) v1@5478,1548 ; 5462.15,1550.56 ccw(c5478,1566.41) v1@5478,1544 ; 5468.98,1543.73 ccw(c5478,1552.75) v1@5478,1540 ; v1(5478,1543) 5486,1535 ; v1@5478.23,1538.01 cw(c5478.72,1527.72) 5486,1535 ; v1@5482.99,1542.77 ccw(c5493.28,1542.28) 5486,1535 ; R22.1@5498.14,1528.05 ccw(c5486,1520.93) 5486,1535 ; R22.1@5498.14,1541.95 cw(c5486,1549.07) 5486,1535 ; R22.1@5501.59,1530.07 ccw(c5492.98,1525.02) 5492.98,1535 ccw(c5492.98,1544.98) R22.1@5501.59,1539.93 ; R22.1@5510,1535 5486,1535 ; v1@6158,1538 cw(c6158,1525.93) 6166.54,1534.46 cw(c6175.07,1543) v1@6163,1543 ; v1(6158,1543) 6343.48,1357.52 K5.4@6399.65,1357.52 6539.52,1357.52 6558,1376 6558,1636 6502,1692 6502,1927 ; K5.4@6377.3,1345.01 ccw(c6347.11,1314.82) 6347.11,1357.52 ccw(c6347.11,1400.22) K5.4@6377.3,1370.03 ; K5.4@6380.13,1347.84 ccw(c6356.77,1324.48) 6356.77,1357.52 ccw(c6356.77,1390.56) K5.4@6380.13,1367.2 ; K5.4@6382.96,1350.67 ccw(c6366.42,1334.14) 6366.42,1357.52 ccw(c6366.42,1380.9) K5.4@6382.96,1364.37 ; K5.4@6416.34,1350.67 cw(c6432.87,1334.14) 6432.87,1357.52 cw(c6432.87,1380.9) K5.4@6416.34,1364.37 ; K5.4@6419.17,1347.84 cw(c6442.53,1324.48) 6442.53,1357.52 cw(c6442.53,1390.56) K5.4@6419.17,1367.2 ; K5.4@6421.99,1345.01 cw(c6452.18,1314.82) 6452.18,1357.52 cw(c6452.18,1400.22) K5.4@6421.99,1370.03 ; P2.4@6512.43,1960.12 cw(c6475.44,1953.57) 6502,1927 ; P2.4@6516.37,1960.81 cw(c6484.66,1955.2) 6507.43,1932.43 cw(c6530.2,1909.66) P2.4@6535.81,1941.37 ; P2.4@6520.31,1961.51 cw(c6493.88,1956.83) 6512.86,1937.86 cw(c6531.83,1918.88) P2.4@6536.51,1945.31 ; P2.4@6524.25,1962.21 cw(c6503.11,1958.47) 6518.29,1943.29 cw(c6533.47,1928.11) P2.4@6537.21,1949.25 ; P2.4@6535.12,1937.43 ccw(c6528.57,1900.44) 6502,1927 ; P2.4@6540,1965 6502,1927
  Bottom Layer w4: v1(5478,1543) v1(6158,1543) ; v1@5481.54,1539.46 cw(c5490.07,1530.93) 5490.07,1543 cw(c5490.07,1555.07) v1@5481.54,1546.54 ; v1@6154.46,1539.46 ccw(c6145.93,1530.93) 6145.93,1543 ccw(c6145.93,1555.07) v1@6154.46,1546.54
LCD_BL: P1.23 P3.42 U1.76 | length 5180
  Top Layer w4: 5089,3470.99 ccw(c5103.12,3470.99) U1.76@5093.14,3461 ; v1@5101.01,3700.31 ccw(c5097.5,3698.6) 5097.5,3702.5 ; v1@5101.01,3704.69 cw(c5097.5,3706.4) 5097.5,3702.5 ; U1.76@5105.13,3445.71 5089,3461.84 5089,3643 5110,3664 5110,3690 ; v1(5105.5,3702.5) 5097.5,3702.5 ; v1@5106.29,3701.88 ccw(c5111.45,3697.83) 5106.81,3693.19 ; v1@5109.43,3699.41 ccw(c5115.03,3695.03) 5110,3690 ; v1@5340.46,4218.54 ccw(c5331.93,4227.07) 5344,4227.07 ccw(c5356.07,4227.07) v1@5347.54,4218.54 ; v1(5344,4215) 5344,4586 ; 5348.74,4590.74 cw(c5394.56,4544.92) P1.23@5413.12,4607.01 ; 5353.48,4595.48 cw(c5396.74,4552.22) P1.23@5414.27,4610.84 ; 5358.22,4600.22 cw(c5398.93,4559.52) P1.23@5415.42,4614.67 ; 5362.96,4604.96 cw(c5401.11,4566.82) P1.23@5416.56,4618.5 ; 5367.7,4609.7 cw(c5403.29,4574.12) P1.23@5417.71,4622.34 ; 5372.44,4614.44 cw(c5405.47,4581.42) P1.23@5418.85,4626.17 ; 5377.18,4619.18 cw(c5407.66,4588.71) P1.23@5420,4630 5388,4630 ; 5381.93,4623.93 cw(c5409.84,4596.01) P1.23@5421.15,4633.83 ; 5386.67,4628.67 cw(c5412.02,4603.31) P1.23@5422.29,4637.66 ; P1.23@5392.25,4626.28 ccw(c5388,4625.72) 5388,4630 ; P1.23@5392.25,4633.72 cw(c5388,4634.28) 5388,4630 ; P1.23@5411.98,4603.17 ccw(c5392.38,4537.63) 5344,4586 ; 5097.5,3702.5 5110,3690 ; 5344,4586 5388,4630
  Bottom Layer w4: 3591.2,3824 ccw(c3591.2,3843.8) P3.42@3605.2,3829.8 ; P3.42@3643.12,3801.53 cw(c3656.43,3795.31) 3656.43,3810 cw(c3656.43,3824.69) P3.42@3643.12,3818.47 ; P3.42@3646.74,3799.84 cw(c3662.71,3792.37) 3662.71,3810 cw(c3662.71,3827.63) P3.42@3646.74,3820.16 ; P3.42@3650.37,3798.14 cw(c3669,3789.43) 3669,3810 ; P3.42@3650.37,3821.86 ccw(c3669,3830.57) 3669,3810 ; v1(5105.5,3702.5) 5127,3724 5127,3776 5104,3799 4988,3799 4961,3772 3707,3772 3669,3810 ; v1@5105.5,3707.5 ccw(c5105.5,3719.57) 5114.04,3711.04 ccw(c5122.57,3702.5) v1@5110.5,3702.5 ; v1@5340.46,4211.46 ccw(c5331.93,4202.93) 5331.93,4215 ccw(c5331.93,4227.07) v1@5340.46,4218.54 ; v1(5344,4215) 4432,4215 4089,3872 3683,3872 3673,3862 3576,3862 3572,3858 3572,3840 3588,3824 3611,3824 P3.42@3625,3810 3669,3810
NetBEEP1_2: BEEP1.2 Q1.3 | length 701.2
  Top Layer w4: Q1.3@6335,4097 6480,4097 6510,4127 BEEP1.2@6510,4255 ; Q1.3@6347.97,4092.89 cw(c6357.89,4082.97) 6357.89,4097 cw(c6357.89,4111.03) Q1.3@6347.97,4101.11 ; Q1.3@6350.8,4090.06 cw(c6367.54,4073.31) 6367.54,4097 cw(c6367.54,4120.69) Q1.3@6350.8,4103.94 ; BEEP1.2@6490.54,4235.54 cw(c6443.54,4188.54) 6510,4188.54 cw(c6576.46,4188.54) BEEP1.2@6529.46,4235.54 ; BEEP1.2@6493.36,4238.36 cw(c6453.2,4198.2) 6510,4198.2 cw(c6566.8,4198.2) BEEP1.2@6526.64,4238.36 ; BEEP1.2@6496.19,4241.19 cw(c6462.86,4207.86) 6510,4207.86 cw(c6557.14,4207.86) BEEP1.2@6523.81,4241.19 ; BEEP1.2@6499.02,4244.02 cw(c6472.51,4217.51) 6510,4217.51 cw(c6547.49,4217.51) BEEP1.2@6520.98,4244.02
NetBT1_1: BT1.1 D2.1 | length 2299.6
  Top Layer w4: BT1.1@4550,1650 4695,1795 D2.1@4930,1795 ; BT1.1@4580.65,1650 cw(c4654.63,1650) 4602.32,1702.32 ; BT1.1@4581.5,1693.15 ccw(c4581.5,1721.28) 4601.39,1701.39 ; BT1.1@4581.5,1697.15 ccw(c4581.5,1734.94) 4608.22,1708.22 ; BT1.1@4581.5,1701.15 ccw(c4581.5,1748.6) 4615.05,1715.05 ; BT1.1@4584.65,1650 cw(c4668.29,1650) 4609.14,1709.14 ; BT1.1@4588.65,1650 cw(c4681.94,1650) 4615.97,1715.97 ; BT1.1@4592.65,1650 cw(c4695.6,1650) 4622.8,1722.8 ; BT1.1@4596.65,1650 cw(c4709.26,1650) 4629.63,1729.63 ; BT1.1@4600.65,1650 cw(c4722.91,1650) 4636.46,1736.46 ; BT1.1@4604.65,1650 cw(c4736.57,1650) 4643.29,1743.29 ; BT1.1@4608.65,1650 cw(c4750.23,1650) 4650.11,1750.11 ; BT1.1@4612.65,1650 cw(c4763.89,1650) 4656.94,1756.94 ; BT1.1@4616.65,1650 cw(c4777.54,1650) 4663.77,1763.77 ; BT1.1@4620.65,1650 cw(c4791.2,1650) 4670.6,1770.6 ; BT1.1@4624.65,1650 cw(c4804.86,1650) 4677.43,1777.43 ; BT1.1@4628.65,1650 cw(c4818.51,1650) 4684.26,1784.26 ; BT1.1@4632.65,1650 cw(c4832.17,1650) 4691.08,1791.08 ; D2.1@4909.38,1778.32 ccw(c4869.11,1738.05) 4869.11,1795 ccw(c4869.11,1851.95) D2.1@4909.38,1811.68 ; D2.1@4912.21,1781.15 ccw(c4878.77,1747.7) 4878.77,1795 ccw(c4878.77,1842.3) D2.1@4912.21,1808.85 ; D2.1@4915.04,1783.98 ccw(c4888.42,1757.36) 4888.42,1795 ccw(c4888.42,1832.64) D2.1@4915.04,1806.02 ; D2.1@4917.87,1786.8 ccw(c4898.08,1767.02) 4898.08,1795 ccw(c4898.08,1822.98) D2.1@4917.87,1803.2
NetC3_2: C3.2 K1.2 | length 524.3
  Top Layer w4: C3.2@5201.25,1592.99 cw(c5168.06,1592.99) 5191.53,1569.52 cw(c5215,1546.05) C3.2@5215,1579.24 ; C3.2@5205.25,1592.99 cw(c5181.72,1592.99) 5198.36,1576.35 cw(c5215,1559.71) C3.2@5215,1583.24 ; C3.2@5215,1592.99 5187,1564.99 5187,1482 5265.35,1403.65 K1.2@5265.35,1357.52 ; K1.2@5252.85,1370.03 ccw(c5222.66,1400.22) 5265.35,1400.22 ccw(c5308.05,1400.22) K1.2@5277.86,1370.03 ; K1.2@5255.68,1367.2 ccw(c5232.32,1390.56) 5265.35,1390.56 ccw(c5298.39,1390.56) K1.2@5275.03,1367.2 ; K1.2@5258.51,1364.37 ccw(c5241.97,1380.9) 5265.35,1380.9 ccw(c5288.74,1380.9) K1.2@5272.2,1364.37
NetC6_2: C6.2 D1.2 D2.2 U1.6 | length 2871.8
  Top Layer w4: C6.2@5045,1592.99 5070,1617.99 D2.2@5070,1795 5070,1920 D1.2@5075,1925 5075,2170 5159,2254 5159,2344 5190,2375 5190,2511.75 5133,2568.75 5133,2772 5139,2778 5157,2778 5163,2772 5163,2636.2 U1.6@5369.6,2429.6 ; C6.2@5045,1602.74 ccw(c5045,1626.27) 5061.64,1609.63 ccw(c5078.28,1592.99) C6.2@5054.75,1592.99 ; C6.2@5045,1606.74 ccw(c5045,1639.93) 5068.47,1616.46 ccw(c5091.94,1592.99) C6.2@5058.75,1592.99 ; D2.2@5053.32,1778.32 cw(c5013.05,1738.05) 5070,1738.05 cw(c5126.95,1738.05) D2.2@5086.68,1778.32 ; D2.2@5053.32,1811.68 ccw(c5013.05,1851.95) 5070,1851.95 ccw(c5126.95,1851.95) D2.2@5086.68,1811.68 ; D1.2@5054.38,1908.32 cw(c5016.68,1870.61) 5070,1870.61 ; D2.2@5056.15,1781.15 cw(c5022.7,1747.7) 5070,1747.7 cw(c5117.3,1747.7) D2.2@5083.85,1781.15 ; D2.2@5056.15,1808.85 ccw(c5022.7,1842.3) 5070,1842.3 ccw(c5117.3,1842.3) D2.2@5083.85,1808.85 ; D1.2@5057.21,1911.15 cw(c5026.33,1880.27) 5070,1880.27 ; D1.2@5058.32,1941.68 ccw(c5018.05,1981.95) 5075,1981.95 ccw(c5131.95,1981.95) D1.2@5091.68,1941.68 ; D2.2@5058.98,1783.98 cw(c5032.36,1757.36) 5070,1757.36 cw(c5107.64,1757.36) D2.2@5081.02,1783.98 ; D2.2@5058.98,1806.02 ccw(c5032.36,1832.64) 5070,1832.64 ccw(c5107.64,1832.64) D2.2@5081.02,1806.02 ; D1.2@5060.04,1913.98 cw(c5035.99,1889.93) 5070,1889.93 ; D1.2@5061.15,1938.85 ccw(c5027.7,1972.3) 5075,1972.3 ccw(c5122.3,1972.3) D1.2@5088.85,1938.85 ; D2.2@5061.8,1786.8 cw(c5042.02,1767.02) 5070,1767.02 cw(c5097.98,1767.02) D2.2@5078.2,1786.8 ; D2.2@5061.8,1803.2 ccw(c5042.02,1822.98) 5070,1822.98 ccw(c5097.98,1822.98) D2.2@5078.2,1803.2 ; D1.2@5063.98,1936.02 ccw(c5037.36,1962.64) 5075,1962.64 ccw(c5112.64,1962.64) D1.2@5086.02,1936.02 ; D1.2@5066.8,1933.2 ccw(c5047.02,1952.98) 5075,1952.98 ccw(c5102.98,1952.98) D1.2@5083.2,1933.2 ; 5070,1865.48 cw(c5130.58,1865.48) D1.2@5087.74,1908.32 ; 5070,1875.14 cw(c5120.93,1875.14) D1.2@5084.92,1911.15 ; 5070,1884.79 cw(c5111.27,1884.79) D1.2@5082.09,1913.98 ; 5070,1894.45 cw(c5101.61,1894.45) D1.2@5079.26,1916.8 ; U1.6@5353.63,2443.24 ccw(c5348,2443.24) 5351.98,2447.22 ccw(c5355.96,2451.2) U1.6@5355.96,2445.57
NetC7_2: C7.2 R3.1 U1.24 Y2.2 | length 1458.9
  Top Layer w4: U1.24@5620.15,2680.15 5635.29,2665 5765,2665 5861,2761 5905.16,2761 ; U1.24@5635.44,2668.15 ccw(c5643.05,2675.77) 5643.05,2665 ; Y2.2@5894.74,2529.91 ccw(c5869.59,2555.05) 5905.16,2555.05 ccw(c5940.72,2555.05) Y2.2@5915.58,2529.91 ; Y2.2@5897.57,2527.08 ccw(c5879.25,2545.4) 5905.16,2545.4 ccw(c5931.07,2545.4) Y2.2@5912.75,2527.08 ; Y2.2@5905.16,2519.49 5905.16,2761 ; C7.2@6084.24,2730 ccw(c6051.05,2730) 6074.52,2753.47 ccw(c6097.99,2776.94) C7.2@6097.99,2743.75 ; C7.2@6088.24,2730 ccw(c6064.71,2730) 6081.35,2746.64 ccw(c6097.99,2763.28) C7.2@6097.99,2739.75 ; C7.2@6104.88,2723.11 cw(c6121.53,2706.47) 6121.53,2730 cw(c6121.53,2753.53) C7.2@6104.88,2736.89 ; C7.2@6107.71,2720.28 cw(c6131.18,2696.81) 6131.18,2730 cw(c6131.18,2763.19) C7.2@6107.71,2739.72 ; R3.1@6165.28,2720.28 ccw(c6141.81,2696.81) 6141.81,2730 ccw(c6141.81,2763.19) R3.1@6165.28,2739.72 ; R3.1@6168.11,2723.11 ccw(c6151.47,2706.47) 6151.47,2730 ccw(c6151.47,2753.53) R3.1@6168.11,2736.89 ; R3.1@6175,2730 C7.2@6097.99,2730 6066.99,2761 ; 5905.16,2761 6066.99,2761 ; 5905.16,2761 5905.16,2779.15 5958.01,2832 5995.99,2832 6066.99,2761
NetC8_2: C8.2 R3.2 U1.23 Y2.1 | length 2170.5
  Top Layer w4: 5591.1,2689.07 ccw(c5601.79,2689.07) U1.23@5594.23,2681.52 ; U1.23@5606.23,2666.23 5591.1,2681.35 5591.1,2704.9 5550,2746 5550,2961 v1(5641.01,3052.01) ; v1@5636.01,3052.01 cw(c5623.93,3052.01) 5632.47,3043.47 cw(c5641.01,3034.93) v1@5641.01,3047.01 ; v1@6168,2929 cw(c6168,2916.93) 6176.54,2925.46 cw(c6185.07,2934) v1@6173,2934 ; v1(6168,2934) 6237.99,2864.01 R3.2@6237.99,2730 6261.99,2754 6358.99,2754 C8.2@6382.99,2730 6382.99,2627.39 6377.6,2622 Y2.1@6377.6,2519.49 ; R3.2@6228.27,2739.72 ccw(c6204.8,2763.19) 6237.99,2763.19 ccw(c6271.18,2763.19) R3.2@6247.71,2739.72 ; R3.2@6231.1,2736.89 ccw(c6214.46,2753.53) 6237.99,2753.53 ccw(c6261.53,2753.53) R3.2@6244.88,2736.89 ; R3.2@6237.99,2739.75 ccw(c6237.99,2763.28) 6254.63,2746.64 ccw(c6271.27,2730) R3.2@6247.74,2730 ; R3.2@6237.99,2743.75 ccw(c6237.99,2776.94) 6261.46,2753.47 ccw(c6284.93,2730) R3.2@6251.74,2730 ; Y2.1@6367.18,2529.91 ccw(c6342.03,2555.05) 6377.6,2555.05 ccw(c6413.16,2555.05) Y2.1@6388.02,2529.91 ; C8.2@6369.24,2730 ccw(c6336.05,2730) 6359.52,2753.47 ccw(c6382.99,2776.94) C8.2@6382.99,2743.75 ; Y2.1@6370.01,2527.08 ccw(c6351.69,2545.4) 6377.6,2545.4 ccw(c6403.51,2545.4) Y2.1@6385.19,2527.08 ; C8.2@6373.27,2720.28 cw(c6349.8,2696.81) 6382.99,2696.81 cw(c6416.18,2696.81) C8.2@6392.71,2720.28 ; C8.2@6373.24,2730 ccw(c6349.71,2730) 6366.35,2746.64 ccw(c6382.99,2763.28) C8.2@6382.99,2739.75 ; C8.2@6376.1,2723.11 cw(c6359.46,2706.47) 6382.99,2706.47 cw(c6406.53,2706.47) C8.2@6389.88,2723.11
  Bottom Layer w4: v1(5641.01,3052.01) 5695.55,3052.01 5813.55,2934 v1(6168,2934) ; v1@5644.54,3048.47 cw(c5653.08,3039.93) 5653.08,3052.01 cw(c5653.08,3064.08) v1@5644.54,3055.54 ; v1@6164.46,2930.46 ccw(c6155.93,2921.93) 6155.93,2934 ccw(c6155.93,2946.07) v1@6164.46,2937.54
NetC9_2: C9.2 U1.106 | length 678.6
  Top Layer w4: C9.2@4117.99,3055 4660.68,3055 U1.106@4687.55,3028.13 ; C9.2@4124.88,3048.11 cw(c4141.53,3031.47) 4141.53,3055 cw(c4141.53,3078.53) C9.2@4124.88,3061.89 ; C9.2@4127.71,3045.28 cw(c4151.18,3021.81) 4151.18,3055 cw(c4151.18,3088.19) C9.2@4127.71,3064.72 ; U1.106@4671.57,3041.77 ccw(c4665.95,3041.77) 4669.93,3045.75 ccw(c4673.9,3049.73) U1.106@4673.9,3044.1
NetC10_2: C10.2 U1.71 | length 844.3
  Top Layer w4: U1.71@5313.92,3473.55 5327.77,3487.4 5382.99,3487.4 v1(5383.19,3487.19) ; U1.71@5329.21,3485.54 cw(c5333.68,3481.07) 5333.68,3487.4 ; U1.71@5329.21,3488.84 ccw(c5332.69,3492.33) U1.71@5332.69,3487.4 ; 5370.63,3487.4 cw(c5370.63,3474.63) v1@5379.66,3483.66 ; 5371.61,3487.4 ccw(c5371.61,3498.77) v1@5379.66,3490.73 ; v1@5890.7,3511.17 cw(c5886.76,3496.46) 5899.95,3504.07 ; v1@5891.99,3511 cw(c5891.99,3498.93) 5900.53,3507.46 cw(c5909.06,3516) v1@5896.99,3516 ; v1(5891.99,3516) C10.2@5917.99,3490 ; v1@5893.29,3511.17 cw(c5895.59,3502.57) 5900.05,3510.28 ; v1@5896.82,3514.71 ccw(c5905.43,3512.4) 5897.71,3507.95 ; v1@5896.82,3517.29 ccw(c5911.54,3521.24) 5903.92,3508.04 ; C10.2@5904.24,3490 ccw(c5871.05,3490) 5894.52,3513.47 ccw(c5917.99,3536.94) C10.2@5917.99,3503.75 ; C10.2@5908.24,3490 ccw(c5884.71,3490) 5901.35,3506.64 ccw(c5917.99,3523.28) C10.2@5917.99,3499.75
  Bottom Layer w4: v1(5383.19,3487.19) 5412,3516 v1(5891.99,3516) ; v1@5383.19,3492.19 ccw(c5383.19,3504.27) 5391.73,3495.73 ccw(c5400.27,3487.19) v1@5388.19,3487.19 ; v1@5888.46,3512.46 ccw(c5879.92,3503.93) 5879.92,3516 ccw(c5879.92,3528.07) v1@5888.46,3519.54
NetC28_2: C28.2 U4.15 | length 771
  Top Layer w4: U4.15@3189.76,1731.46 ccw(c3188.2,1736) 3193,1736 ; U4.15@3193,1694 3193,1736 ; U4.15@3196.24,1731.46 cw(c3197.8,1736) 3193,1736 ; C28.2@3617.01,1530 3646,1558.99 3646,1654 3585.95,1714.05 3558,1714.05 3530.05,1742 3199,1742 3193,1736 ; C28.2@3617.01,1539.75 ccw(c3617.01,1563.28) 3633.65,1546.64 ccw(c3650.29,1530) C28.2@3626.76,1530 ; C28.2@3617.01,1543.75 ccw(c3617.01,1576.94) 3640.48,1553.47 ccw(c3663.95,1530) C28.2@3630.76,1530
NetC29_2: C29.2 U4.4 | length 684.6
  Top Layer w4: U4.4@3289.76,1511.46 ccw(c3288.2,1516) 3293,1516 ; U4.4@3293,1474 3293,1516 ; U4.4@3296.24,1511.46 cw(c3297.8,1516) 3293,1516 ; C29.2@3603.26,1415 ccw(c3570.07,1415) 3593.54,1438.47 ccw(c3617.01,1461.94) C29.2@3617.01,1428.75 ; C29.2@3607.26,1415 ccw(c3583.73,1415) 3600.37,1431.64 ccw(c3617.01,1448.28) C29.2@3617.01,1424.75 ; C29.2@3617.01,1415 3503.01,1529 3440,1529 3422,1511 3422,1440 3406,1424 3381,1424 3373,1432 3373,1504 3355,1522 3299,1522 3293,1516
NetC30_2: C30.2 U4.7 Y3.2 | length 1126.7
  Top Layer w4: C30.2@2865,1232.99 2886.5,1254.49 ; C30.2@2865.62,1242.72 ccw(c2866.84,1261.64) 2880.24,1248.23 ccw(c2893.64,1234.83) C30.2@2874.73,1233.62 ; C30.2@2865.88,1246.71 ccw(c2867.59,1273.39) 2886.49,1254.49 ; C30.2@2878.72,1233.87 cw(c2905.4,1235.58) 2886.49,1254.49 ; Y3.2@3006.94,1244.07 ccw(c2981.8,1218.92) 2981.8,1254.49 ccw(c2981.8,1290.05) Y3.2@3006.94,1264.91 ; Y3.2@3009.77,1246.9 ccw(c2991.45,1228.58) 2991.45,1254.49 ccw(c2991.45,1280.4) Y3.2@3009.77,1262.08 ; Y3.2@3070.23,1246.9 cw(c3088.55,1228.58) 3088.55,1254.49 cw(c3088.55,1280.4) Y3.2@3070.23,1262.08 ; Y3.2@3073.06,1244.07 cw(c3098.2,1218.92) 3098.2,1254.49 cw(c3098.2,1290.05) Y3.2@3073.06,1264.91 ; U4.7@3435.93,1438.93 cw(c3418.86,1421.86) 3443,1421.86 cw(c3467.14,1421.86) U4.7@3450.07,1438.93 ; U4.7@3438.76,1441.76 cw(c3428.51,1431.51) 3443,1431.51 cw(c3457.49,1431.51) U4.7@3447.24,1441.76 ; U4.7@3443,1474 3443,1273.49 3424,1254.49 Y3.2@3040,1254.49 2886.5,1254.49
NetC31_2: C31.2 U4.8 Y3.1 | length 656.2
  Top Layer w4: Y3.1@3482.34,1264.91 ccw(c3457.19,1290.05) 3492.76,1290.05 ccw(c3528.32,1290.05) Y3.1@3503.17,1264.91 ; Y3.1@3485.17,1262.08 ccw(c3466.85,1280.4) 3492.76,1280.4 ccw(c3518.67,1280.4) Y3.1@3500.34,1262.08 ; U4.8@3485.93,1438.93 cw(c3468.86,1421.86) 3493,1421.86 cw(c3517.14,1421.86) U4.8@3500.07,1438.93 ; U4.8@3488.76,1441.76 cw(c3478.51,1431.51) 3493,1431.51 cw(c3507.49,1431.51) U4.8@3497.24,1441.76 ; U4.8@3493,1474 3493,1364.24 3492.76,1364 Y3.1@3492.76,1254.49 3537.52,1254.49 ; Y3.1@3528.99,1248.81 cw(c3537.52,1245.24) 3537.52,1254.49 ; Y3.1@3528.99,1260.17 ccw(c3537.52,1263.74) 3537.52,1254.49 ; C31.2@3611.25,1167.01 ccw(c3578.06,1167.01) 3601.53,1190.48 ccw(c3625,1213.95) C31.2@3625,1180.76 ; C31.2@3615.25,1167.01 ccw(c3591.72,1167.01) 3608.36,1183.65 ccw(c3625,1200.29) C31.2@3625,1176.76 ; C31.2@3625,1167.01 3537.52,1254.49
NetD3_1: D3.1 R10.2 | length 1648.9
  Top Layer w4: D3.1@3755,1175 3808,1175 ; D3.1@3771.11,1165.27 cw(c3791.36,1149.08) 3791.36,1175 cw(c3791.36,1200.92) D3.1@3771.11,1184.73 ; D3.1@3774.24,1162.77 cw(c3799.68,1142.43) 3799.68,1175 cw(c3799.68,1207.57) D3.1@3774.24,1187.23 ; D3.1@3777.36,1160.27 cw(c3808,1135.78) 3808,1175 ; D3.1@3777.36,1189.73 ccw(c3808,1214.22) 3808,1175 ; v1@3821.46,1236.46 cw(c3812.93,1227.93) 3825,1227.93 cw(c3837.07,1227.93) v1@3828.54,1236.46 ; v1(3825,1240) 3825,1192 3808,1175 ; R10.2@4775,1592.99 v1@4796.99,1571 ; R10.2@4775.46,1583.25 cw(c4776.4,1563.21) 4790.59,1577.4 cw(c4804.78,1591.59) R10.2@4784.74,1592.53 ; R10.2@4775.65,1579.26 cw(c4776.98,1550.99) v1@4796.99,1571 ; R10.2@4785.36,1577.72 ccw(c4794.81,1594.1) v1@4799.71,1575.83 ; R10.2@4785.62,1582.37 ccw(c4801,1597.75) v1@4801,1576 ; R10.2@4788.73,1592.35 ccw(c4817,1591.01) v1@4796.99,1571 ; 4792.45,1575.54 ccw(c4801,1584.09) v1@4801,1572 ; 4793.07,1577.79 ccw(c4803.53,1583.83) v1@4801.19,1571.98 ; 4793.72,1572.89 ccw(c4798.35,1580.91) v1@4800.74,1571.97 ; 4793.73,1572.88 cw(c4791.12,1568.35) v1@4796.17,1569.71 ; v1(4801,1571) v1@4796.99,1571
  Bottom Layer w4: v1(3825,1240) 4144,1559 4789,1559 v1(4801,1571) ; v1@3825,1245 ccw(c3825,1257.07) 3833.54,1248.54 ccw(c3842.07,1240) v1@3830,1240 ; v1@4796,1571 cw(c4783.93,1571) 4792.46,1562.46 cw(c4801,1553.93) v1@4801,1566
NetD4_1: D4.1 R11.2 | length 1200.7
  Top Layer w4: D4.1@4030,1175 4066,1175 ; D4.1@4052.64,1169.17 cw(c4060.56,1166.7) 4060.56,1175 cw(c4060.56,1183.3) D4.1@4052.64,1180.83 ; D4.1@4056.46,1167.98 cw(c4066,1165.01) 4066,1175 ; D4.1@4056.46,1182.02 ccw(c4066,1184.99) 4066,1175 ; R11.2@4831.25,1592.99 ccw(c4798.06,1592.99) 4821.53,1616.46 ccw(c4845,1639.93) R11.2@4845,1606.74 ; R11.2@4835.25,1592.99 ccw(c4811.72,1592.99) 4828.36,1609.63 ccw(c4845,1626.27) R11.2@4845,1602.74 ; R11.2@4845,1592.99 4811.25,1626.74 4661.08,1626.74 4238,1203.66 4238,1168 4211,1141 4100,1141 4066,1175
NetD5_1: D5.1 R12.2 | length 1233.6
  Top Layer w4: D5.1@4288.32,1191.68 ccw(c4248.05,1231.95) 4305,1231.95 ccw(c4361.95,1231.95) D5.1@4321.68,1191.68 ; D5.1@4291.15,1188.85 ccw(c4257.7,1222.3) 4305,1222.3 ccw(c4352.3,1222.3) D5.1@4318.85,1188.85 ; D5.1@4293.98,1186.02 ccw(c4267.36,1212.64) 4305,1212.64 ccw(c4342.64,1212.64) D5.1@4316.02,1186.02 ; D5.1@4296.8,1183.2 ccw(c4277.02,1202.98) 4305,1202.98 ccw(c4332.98,1202.98) D5.1@4313.2,1183.2 ; D5.1@4305,1175 4305,1254.33 4667.41,1616.74 4799.26,1616.74 4816,1600 4816,1577 4824,1569 4886.01,1569 R12.2@4910,1592.99 ; R12.2@4896.25,1592.99 cw(c4863.06,1592.99) 4886.53,1569.52 cw(c4910,1546.05) R12.2@4910,1579.24 ; R12.2@4900.25,1592.99 cw(c4876.72,1592.99) 4893.36,1576.35 cw(c4910,1559.71) R12.2@4910,1583.24
NetD6_1: D6.1 R13.2 | length 1069.5
  Top Layer w4: D6.1@4563.32,1191.68 ccw(c4523.05,1231.95) 4580,1231.95 ccw(c4636.95,1231.95) D6.1@4596.68,1191.68 ; D6.1@4566.15,1188.85 ccw(c4532.7,1222.3) 4580,1222.3 ccw(c4627.3,1222.3) D6.1@4593.85,1188.85 ; D6.1@4568.98,1186.02 ccw(c4542.36,1212.64) 4580,1212.64 ccw(c4617.64,1212.64) D6.1@4591.02,1186.02 ; D6.1@4571.8,1183.2 ccw(c4552.02,1202.98) 4580,1202.98 ccw(c4607.98,1202.98) D6.1@4588.2,1183.2 ; D6.1@4580,1175 4580,1431.86 4704.14,1556 4933.01,1556 R13.2@4970,1592.99 ; R13.2@4956.25,1592.99 cw(c4923.06,1592.99) 4946.53,1569.52 cw(c4970,1546.05) R13.2@4970,1579.24 ; R13.2@4960.25,1592.99 cw(c4936.72,1592.99) 4953.36,1576.35 cw(c4970,1559.71) R13.2@4970,1583.24
NetD7_1: D7.1 R23.2 | length 553.7
  Top Layer w4: D7.1@3173.32,2021.68 ccw(c3133.05,2061.95) 3190,2061.95 ccw(c3246.95,2061.95) D7.1@3206.68,2021.68 ; D7.1@3176.15,2018.85 ccw(c3142.7,2052.3) 3190,2052.3 ccw(c3237.3,2052.3) D7.1@3203.85,2018.85 ; D7.1@3178.98,2016.02 ccw(c3152.36,2042.64) 3190,2042.64 ccw(c3227.64,2042.64) D7.1@3201.02,2016.02 ; D7.1@3181.8,2013.2 ccw(c3162.02,2032.98) 3190,2032.98 ccw(c3217.98,2032.98) D7.1@3198.2,2013.2 ; D7.1@3190,2005 3190,2107.99 R23.2@3257.01,2175 ; R23.2@3243.26,2175 cw(c3210.07,2175) 3233.54,2151.53 cw(c3257.01,2128.06) R23.2@3257.01,2161.25 ; R23.2@3247.26,2175 cw(c3223.73,2175) 3240.37,2158.36 cw(c3257.01,2141.72) R23.2@3257.01,2165.25
NetQ1_1: Q1.1 R16.2 R18.2 | length 609.8
  Top Layer w4: R18.2@6242.29,4375.28 cw(c6218.82,4351.81) 6252.01,4351.81 cw(c6285.2,4351.81) R18.2@6261.73,4375.28 ; R18.2@6245.12,4378.11 cw(c6228.47,4361.47) 6252.01,4361.47 cw(c6275.54,4361.47) R18.2@6258.9,4378.11 ; R16.2@6247.29,4240.28 cw(c6223.82,4216.81) 6257.01,4216.81 cw(c6290.2,4216.81) R16.2@6266.73,4240.28 ; R16.2@6247.29,4259.72 ccw(c6235.89,4271.12) 6252.01,4271.12 ; Q1.1@6248.06,4141.94 ccw(c6226.47,4163.53) 6257.01,4163.53 ; R16.2@6250.12,4243.11 cw(c6233.47,4226.47) 6257.01,4226.47 cw(c6280.54,4226.47) R16.2@6263.9,4243.11 ; Q1.1@6250.89,4139.11 ccw(c6236.12,4153.88) 6257.01,4153.88 ; 6252.01,4266.29 ccw(c6273.3,4266.29) R16.2@6258.24,4251.24 ; 6252.01,4275.95 ccw(c6282.96,4275.95) R16.2@6261.07,4254.06 ; 6252.01,4285.6 ccw(c6292.61,4285.6) R16.2@6263.9,4256.89 ; 6252.01,4295.26 ccw(c6302.27,4295.26) R16.2@6266.73,4259.72 ; R18.2@6252.01,4385 6252.01,4255 R16.2@6257.01,4250 6257.01,4137.01 Q1.1@6255,4135 ; 6257.01,4153.84 ccw(c6273.84,4153.84) Q1.1@6261.94,4141.94